# EAGLE board MystiqueJamma (EAGLE 9.1.3)
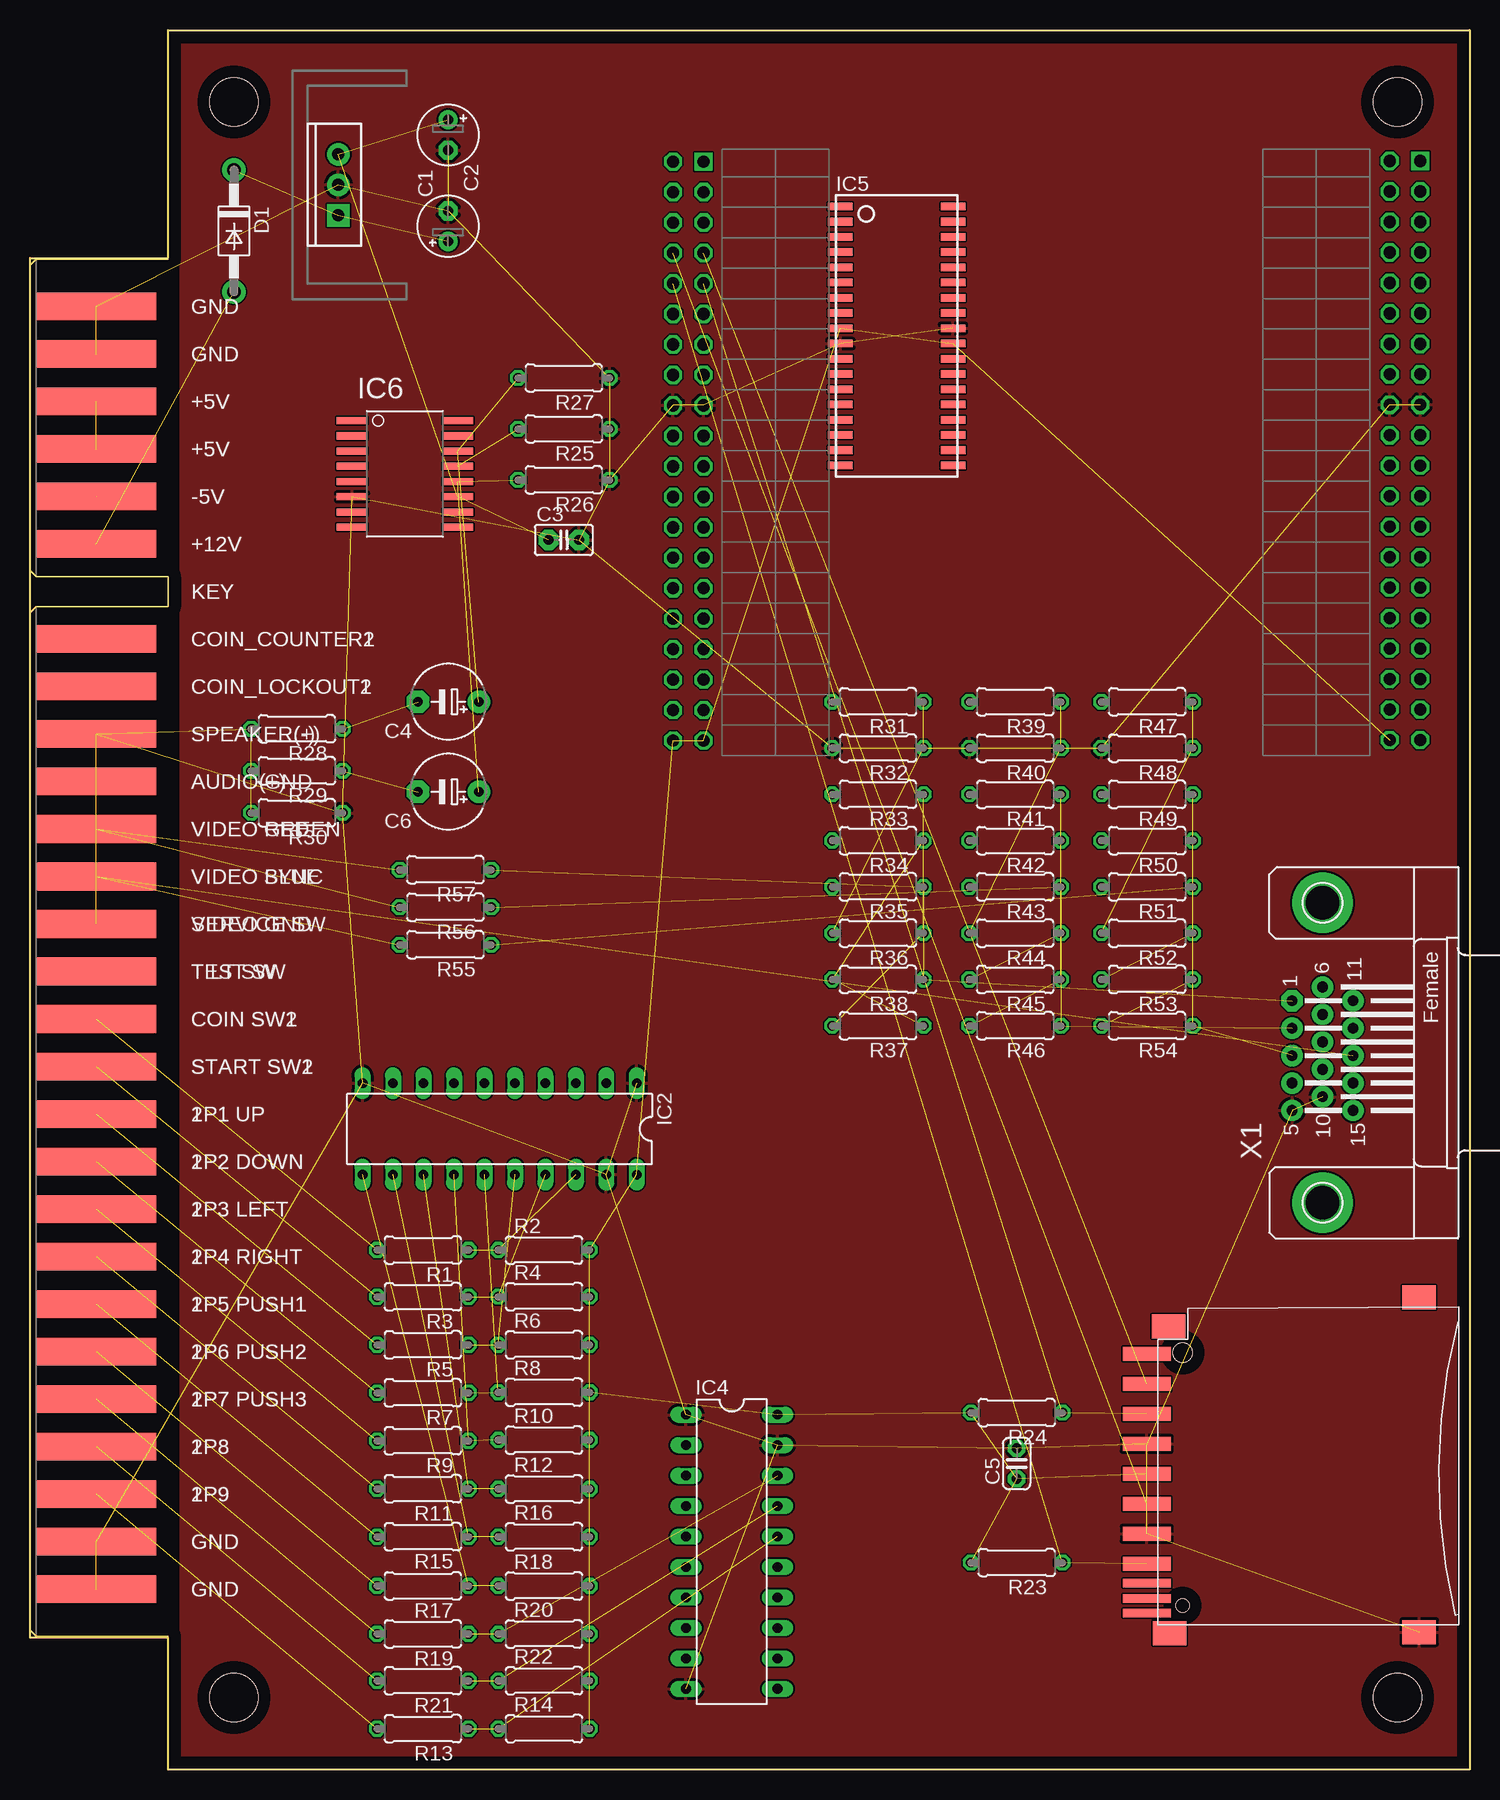
[diagram p0: board, top side]
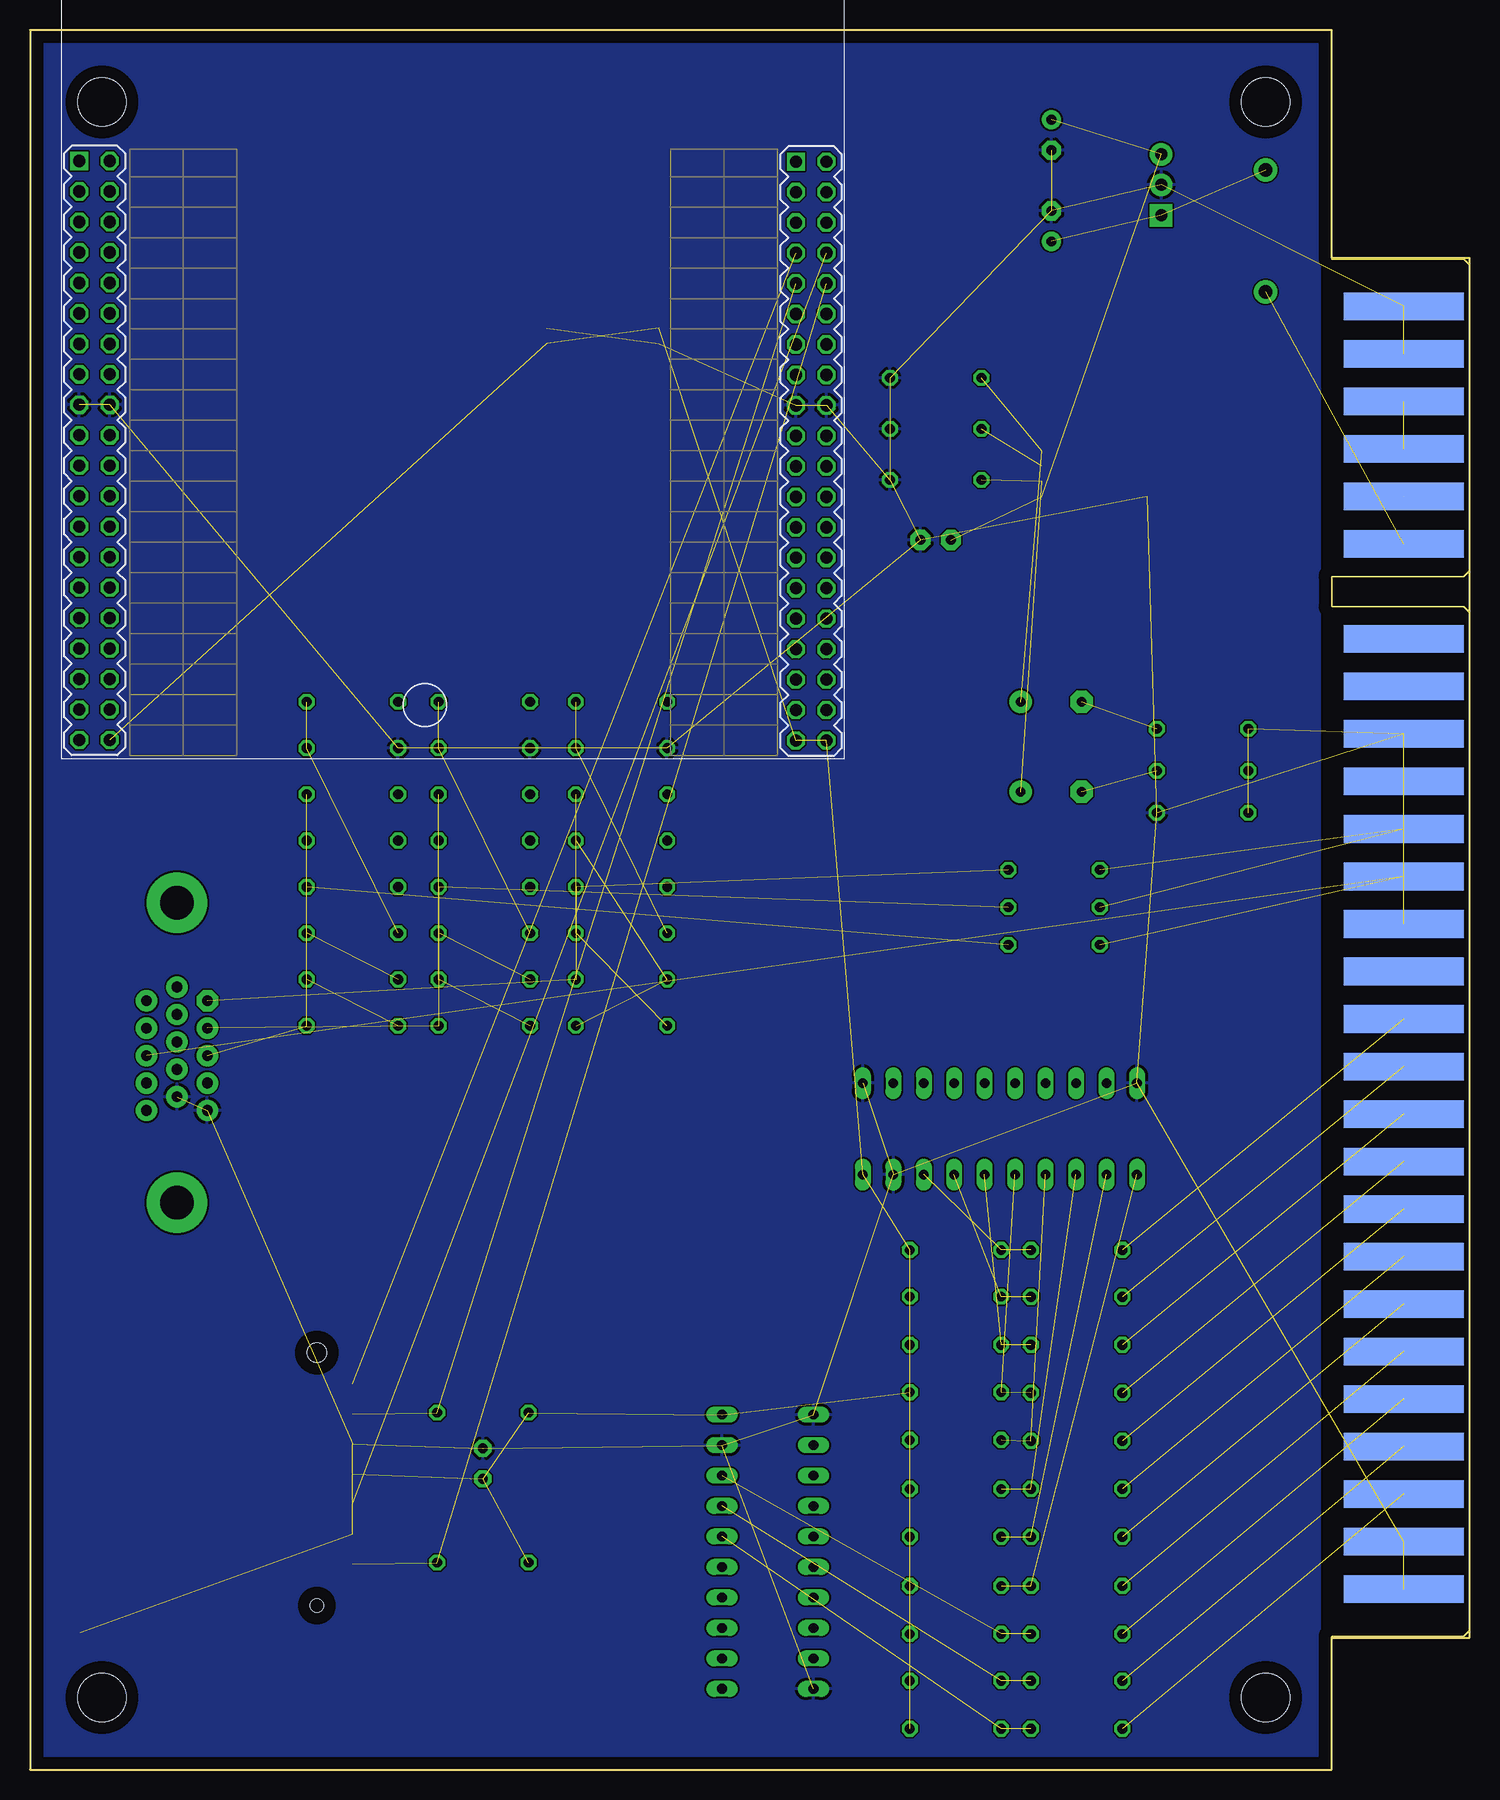
[diagram p1: board, bottom side, seen from below]

Size 120 x 145 mm. Coordinates in mm from the lower left corner, seen from the top.
Outline: 0,11 0,126 11.5,126 11.5,145 120,145 120,0 11.5,0 11.5,11 0,11
Copper layers (1*16): Top 0.035mm / dielectric 1.5mm / Bottom 0.035mm
Design rules "default": minimum track width 6mil, minimum drill 0.35mm, track to track 6mil, track to pad 6mil, pad to pad 6mil, via to via 6mil, smd to smd 6mil, copper to edge 40mil, drill to drill 6mil, minimum pad ring 10mil, minimum via ring 8mil, stop-mask expansion 4mil, vias tented up to drill 0mil, thermal gap 10mil
Holes 4 mm at 17,6 114,6 114,139 17,139

## Footprints (pad centres in the part's own frame; a part is rotated, then mirrored left to right if it is on the bottom)
E6V33 = drill 1.016 octagon: GND1 46.99,-31.14; GND2 46.99,-28.6; GND3 47.041,28.6; GND4 47.041,31.14; I0_1 31.801,31.14; I0_2 31.801,28.6; I0_3 29.261,31.14; I0_7 29.261,28.6; I0_10 26.721,31.14; I0_30 26.67,-28.6; I0_31 29.21,-31.14; I0_32 29.21,-28.6; I0_33 31.75,-31.14; I0_34 31.75,-28.6; I0_38 34.29,-31.14; I0_39 34.29,-28.6; I0_42 36.83,-31.14; I0_43 36.83,-28.6; I0_44 39.37,-31.14; I0_46 39.37,-28.6; I0_49 41.91,-31.14; I0_50 41.91,-28.6; I0_51 44.45,-31.14; I0_52 44.45,-28.6; I0_53 49.53,-31.14; I0_54 49.53,-28.6; I0_55 52.07,-31.14; I0_58 52.07,-28.6; I0_59 54.61,-31.14; I0_60 54.61,-28.6; I0_64 57.15,-31.14; I0_65 57.15,-28.6; I0_66 59.69,-31.14; I0_67 59.69,-28.6; I0_68 62.23,-31.14; I0_69 62.23,-28.6; I0_70 64.77,-31.14; I0_71 64.77,-28.6; I0_72 67.31,-31.14; I0_88 67.31,-28.6; I0_89 69.85,-31.14; I0_90 69.85,-28.6; I0_91 72.39,-31.14; I0_99 72.39,-28.6; I0_100 74.93,-31.14; I0_101 72.441,28.6; I0_103 72.441,31.14; I0_104 69.901,28.6; I0_105 69.901,31.14; I0_106 67.361,28.6; I0_110 67.361,31.14; I0_111 64.821,28.6; I0_112 64.821,31.14; I0_113 62.281,28.6; I0_114 62.281,31.14; I0_115 59.741,28.6; I0_119 59.741,31.14; I0_120 57.201,28.6; I0_121 57.201,31.14; I0_124 54.661,28.6; I0_125 54.661,31.14; I0_126 52.121,28.6; I0_127 52.121,31.14; I0_128 49.581,28.6; I0_129 49.581,31.14; I0_132 44.501,31.14; I0_133 44.501,28.6; I0_135 41.961,31.14; I0_136 41.961,28.6; I0_137 39.421,31.14; I0_138 39.421,28.6; I0_141 36.881,31.14; I0_142 36.881,28.6; I0_143 34.341,31.14; I0_144 34.341,28.6; VCC1 74.93,-28.6; VCC2 74.981,28.6; VCC3 74.981,31.14 | drill 1.016 square: I0_11 26.721,28.6; I0_28 26.67,-31.14
E2,5-5 = drill 0.813 pad 1.6: + -1.27,0 | drill 0.813 pad 1.6 octagon: - 1.27,0
C025-025X050 = drill 0.813 pad 1.676 octagon: 1 -1.27,0; 2 1.27,0
E5-6 = drill 0.813 pad 1.905: + -2.54,0 | drill 0.813 pad 1.905 octagon: - 2.54,0
C025-024X044 = drill 0.813 pad 1.422 octagon: 1 -1.27,0; 2 1.27,0
DO41-10 = drill 1.118 pad 1.93: A 5.08,0; C -5.08,0
TO220-IGO = drill 1 pad 1.88: GND 0,0; OUT 2.54,0 | drill 1 pad 1.88 square: IN -2.54,0
DIL20 = drill 0.813 long: 1 -11.43,-3.81; 2 -8.89,-3.81; 3 -6.35,-3.81; 4 -3.81,-3.81; 5 -1.27,-3.81; 6 1.27,-3.81; 7 3.81,-3.81; 8 6.35,-3.81; 9 8.89,-3.81; 10 11.43,-3.81; 11 11.43,3.81; 12 8.89,3.81; 13 6.35,3.81; 14 3.81,3.81; 15 1.27,3.81; 16 -1.27,3.81; 17 -3.81,3.81; 18 -6.35,3.81; 19 -8.89,3.81; 20 -11.43,3.81
SOJV36-400 = smd 0.635 x 2.032: 1 -10.795,-4.699; 2 -9.525,-4.699; 3 -8.255,-4.699; 4 -6.985,-4.699; 5 -5.715,-4.699; 6 -4.445,-4.699; 7 -3.175,-4.699; 8 -1.905,-4.699; 9 -0.635,-4.699; 10 0.635,-4.699; 11 1.905,-4.699; 12 3.175,-4.699; 13 4.445,-4.699; 14 5.715,-4.699; 15 6.985,-4.699; 16 8.255,-4.699; 17 9.525,-4.699; 18 10.795,-4.699; 19 10.795,4.699; 20 9.525,4.699; 21 8.255,4.699; 22 6.985,4.699; 23 5.715,4.699; 24 4.445,4.699; 25 3.175,4.699; 26 1.905,4.699; 27 0.635,4.699; 28 -0.635,4.699; 29 -1.905,4.699; 30 -3.175,4.699; 31 -4.445,4.699; 32 -5.715,4.699; 33 -6.985,4.699; 34 -8.255,4.699; 35 -9.525,4.699; 36 -10.795,4.699
SOIC-16NW = smd 0.6 x 2.54: 1 -4.445,-4.415; 2 -3.175,-4.415; 3 -1.905,-4.415; 4 -0.635,-4.415; 5 0.635,-4.415; 6 1.905,-4.415; 7 3.175,-4.415; 8 4.445,-4.415; 9 4.445,4.415; 10 3.175,4.415; 11 1.905,4.415; 12 0.635,4.415; 13 -0.635,4.415; 14 -1.905,4.415; 15 -3.175,4.415; 16 -4.445,4.415
JAMMA_TOP = smd 2.3 x 10: 1 -53.46,0; 2 -49.5,0; 3 -45.54,0; 4 -41.58,0; 5 -37.62,0; 6 -33.66,0; 8 -25.74,0; 9 -21.78,0; 10 -17.82,0; 11 -13.86,0; 12 -9.9,0; 13 -5.94,0; 14 -1.98,0; 15 1.98,0; 16 5.94,0; 17 9.9,0; 18 13.86,0; 19 17.82,0; 20 21.78,0; 21 25.74,0; 22 29.7,0; 23 33.66,0; 24 37.62,0; 25 41.58,0; 26 45.54,0; 27 49.5,0; 28 53.46,0
JAMMA_BOTTOM = smd 2.3 x 10 bottom: _A 33.66,0; _B 37.62,0; _C 41.58,0; _D 45.54,0; _E 49.5,0; _F 53.46,0; A -53.46,0; B -49.5,0; C -45.54,0; D -41.58,0; E -37.62,0; F -33.66,0; J -25.74,0; K -21.78,0; L -17.82,0; M -13.86,0; N -9.9,0; P -5.94,0; R -1.98,0; S 1.98,0; T 5.94,0; U 9.9,0; V 13.86,0; W 17.82,0; X 21.78,0; Y 25.74,0; Z 29.7,0
0207/7 = drill 0.813 octagon: 1 -3.81,0; 2 3.81,0
06132 = smd 1.2 x 4: 1 6.9,0.9; 2 4.4,0.9; 3 1.9,0.9; 4 -0.6,0.9; 5 -3.1,0.9; 6 -5.6,0.9; 7 -8.1,0.9; 9 9.4,0.9 | smd 0.7 x 4: 8 -9.7,0.9; CD -11,0.9; WP -12.2,0.9 | smd 2 x 2.8: GP -13.8,-21.8; GP2 14.1,-21.8; GP3 11.7,-0.9; GP4 -13.9,-1 | hole 1.1: -11.6,-2.1 | hole 1.6: 9.5,-2.1
HDF15H = drill 0.9 pad 1.778 octagon: 1 4.329,2.54 | drill 0.9 pad 1.778: 2 2.043,2.54; 3 -0.243,2.54; 4 -2.529,2.54; 5 -4.815,2.54; 6 5.472,0; 7 3.186,0; 8 0.9,0; 9 -1.386,0; 10 -3.672,0; 11 4.329,-2.54; 12 2.043,-2.54; 13 -0.243,-2.54; 14 -2.529,-2.54; 15 -4.815,-2.54 | drill 2.8 pad 5.08: P$1 -12.5,0; P$2 12.5,0

## Placement (x,y rotation side)
B1  [E6V33]  84.75,160.75 270 bottom
C1  10uF  [E2,5-5]  34.85,128.65 90 top
C2  10uF  [E2,5-5]  34.85,136.25 270 top
C3  100nF  [C025-025X050]  44.5,102.5 0 top
C4  4.7uF  [E5-6]  34.88,89 180 top
C5  100nF  [C025-024X044]  82.25,25.5 90 top
C6  4.7uF  [E5-6]  34.88,81.5 180 top
D1  1N4004  [DO41-10]  17,128.25 270 top
IC1  7805  [TO220-IGO]  25.7,132.1 90 top
IC2  74LS245N  [DIL20]  39.15,53.4 180 top
IC4  74LS245N  [DIL20]  58.5,18.15 270 top
IC5  CY7C1049CV33  [SOJV36-400]  72.25,119.5 270 top
IC6  TDA1543T  [SOIC-16NW]  31.25,108 270 top
JAMMA1  JAMMA_TOP  [JAMMA_TOP]  5.5,68.5 270 top
JAMMA2  JAMMA_BOTTOM  [JAMMA_BOTTOM]  5.5,68.5 270 top
R1  330  [0207/7]  32.75,43.3 180 top
R2  10k  [0207/7]  42.85,43.3 0 top
R3  330  [0207/7]  32.75,39.4 180 top
R4  10k  [0207/7]  42.85,39.42 0 top
R5  330  [0207/7]  32.75,35.4 180 top
R6  10k  [0207/7]  42.85,35.4 0 top
R7  330  [0207/7]  32.75,31.4 180 top
R8  10k  [0207/7]  42.85,31.45 0 top
R9  330  [0207/7]  32.75,27.4 180 top
R10  10k  [0207/7]  42.85,27.47 0 top
R11  330  [0207/7]  32.75,23.4 180 top
R12  10k  [0207/7]  42.85,23.38 0 top
R13  330  [0207/7]  32.75,3.4 180 top
R14  10k  [0207/7]  42.85,3.4 0 top
R15  330  [0207/7]  32.75,19.4 180 top
R16  10k  [0207/7]  42.85,19.4 0 top
R17  330  [0207/7]  32.75,15.3 180 top
R18  10k  [0207/7]  42.85,15.3 0 top
R19  330  [0207/7]  32.75,11.3 180 top
R20  10k  [0207/7]  42.85,11.3 0 top
R21  330  [0207/7]  32.75,7.4 180 top
R22  10k  [0207/7]  42.85,7.4 0 top
R23  10k  [0207/7]  82.25,17.25 180 top
R24  10k  [0207/7]  82.25,29.75 180 top
R25  1k  [0207/7]  44.5,111.75 180 top
R26  2k  [0207/7]  44.5,107.5 180 top
R27  2k  [0207/7]  44.5,116 180 top
R28  470  [0207/7]  22.25,86.75 180 top
R29  470  [0207/7]  22.25,83.25 180 top
R30  20k  [0207/7]  22.25,79.75 180 top
R31  2k  [0207/7]  70.69,89 180 top
R32  2k  [0207/7]  70.69,85.14 180 top
R33  2k  [0207/7]  70.69,81.29 180 top
R34  2k  [0207/7]  70.69,77.43 180 top
R35  2k  [0207/7]  70.69,73.57 180 top
R36  1k  [0207/7]  70.69,69.71 180 top
R37  1k  [0207/7]  70.69,62 180 top
R38  1k  [0207/7]  70.69,65.86 180 top
R39  2k  [0207/7]  82.12,89 180 top
R40  2k  [0207/7]  82.12,85.14 180 top
R41  2k  [0207/7]  82.12,81.29 180 top
R42  2k  [0207/7]  82.12,77.43 180 top
R43  2k  [0207/7]  82.12,73.57 180 top
R44  1k  [0207/7]  82.12,69.71 180 top
R45  1k  [0207/7]  82.12,65.86 180 top
R46  1k  [0207/7]  82.12,62 180 top
R47  2k  [0207/7]  93.12,89 180 top
R48  2k  [0207/7]  93.12,85.14 180 top
R49  2k  [0207/7]  93.12,81.29 180 top
R50  2k  [0207/7]  93.12,77.43 180 top
R51  2k  [0207/7]  93.12,73.57 180 top
R52  1k  [0207/7]  93.12,69.71 180 top
R53  1k  [0207/7]  93.12,65.86 180 top
R54  1k  [0207/7]  93.12,62 180 top
R55  220  [0207/7]  34.62,68.75 180 top
R56  220  [0207/7]  34.62,71.88 180 top
R57  220  [0207/7]  34.62,75 180 top
U$2  SDMMC06132  [06132]  94,25.25 90 top
X1  [HDF15H]  107.75,59.75 90 top

## Library data of the parts
B1 = FPGA-BOARD
C1 C2 = rcl-2
C3-C6 D1 R1-R57 U$2 X1 = adafruit
IC1 = SparkFun
IC2 IC4 = 74xx-us
IC5 = memory-sram
IC6 = TDA1543
JAMMA1 JAMMA2 = JAMMA

## Nets
12+: JAMMA2.F
+3V3: B1.VCC1 B1.VCC2 B1.VCC3 C5.1 IC2.20 IC4.20 IC5.9 IC5.27 R2.2 R4.2 R6.2 R8.2 R10.2 R12.2 R14.2 R16.2 R18.2 R20.2 R22.2 R23.2 R24.2 U$2.4
+5REG: C2.+ C3.1 IC1.OUT IC6.11
+5V: JAMMA1.3 JAMMA1.4 JAMMA2.C JAMMA2.D
+12: D1.A JAMMA1.6
-5V: JAMMA1.5 JAMMA2.E
COINSW1: JAMMA1.16 R1.2
CS1_: IC2.18 R1.1 R2.1
CS1_3V: IC2.2
DAC_DATA: IC6.5
DAC_FSYNC: IC6.4
DAC_SCK: IC6.3
DAC_VREF: IC6.13 R25.2
GND: B1.GND1 B1.GND2 B1.GND3 B1.GND4 C1.- C2.- C3.2 C5.2 IC1.GND IC2.1 IC2.10 IC2.19 IC4.1 IC4.10 IC4.19 IC5.10 IC5.28 IC6.6 JAMMA1.1 JAMMA1.2 JAMMA1.14 JAMMA1.27 JAMMA1.28 JAMMA2._E JAMMA2._F JAMMA2.A JAMMA2.B JAMMA2.L R25.1 R26.1 R27.1 R30.1 R32.2 R40.2 R48.2 U$2.3 U$2.6 U$2.GP X1.5 X1.10
JAMMA_SPK+: JAMMA1.10 R28.2 R29.2 R30.2
JVIDEO_BLUE: JAMMA1.13 R55.2
JVIDEO_GREEN: JAMMA2.N R56.2
JVIDEO_RED: JAMMA1.12 R57.2
L_A: C6.+ IC6.12 R26.2
L_AUDIO: C6.- R29.1
N$1: R31.1 R32.1 R36.2
N$2: C1.+ D1.C IC1.IN
N$3: R33.1 R36.1 R37.2
N$4: X1.8
N$5: X1.7
N$6: X1.6
N$7: R34.1 R37.1 R38.2
N$8: R39.1 R40.1 R44.2
N$9: R41.1 R44.1 R45.2
N$10: R42.1 R45.1 R46.2
N$11: R47.1 R48.1 R52.2
N$12: R49.1 R52.1 R53.2
N$13: R50.1 R53.1 R54.2
P1B1: JAMMA1.22 R15.2
P1B1_: IC2.12 R15.1 R16.1
P1B1_3V: IC2.8
P1B2: JAMMA1.23 R17.2
P1B2_: IC2.11 R17.1 R18.1
P1B2_3V: IC2.9
P1B3: JAMMA1.24 R19.2
P1B3_: IC4.18 R19.1 R20.1
P1B3_3V: IC4.2
P1B4: JAMMA1.25 R21.2
P1B4_: IC4.17 R21.1 R22.1
P1B4_3V: IC4.3
P1B5: JAMMA1.26 R13.2
P1B5_: IC4.16 R13.1 R14.1
P1B5_3V: IC4.4
P1D_: IC2.15 R7.1 R8.1
P1D_3V: IC2.5
P1DW: JAMMA1.19 R7.2
P1L_: IC2.14 R9.1 R10.1
P1L_3V: IC2.6
P1LH: JAMMA1.20 R9.2
P1R_: IC2.13 R11.1 R12.1
P1R_3V: IC2.7
P1RH: JAMMA1.21 R11.2
P1S_: IC2.17 R3.1 R4.1
P1S_3V: IC2.3
P1START: JAMMA1.17 R3.2
P1U_: IC2.16 R5.1 R6.1
P1U_3V: IC2.4
P1UP: JAMMA1.18 R5.2
R_A: C4.+ IC6.14 R27.2
R_AUDIO: C4.- R28.1
SD_CS_144: B1.I0_144 U$2.1
SD_DATAIN_142: B1.I0_142 R24.1 U$2.2
SD_DATAOUT_141: B1.I0_141 R23.1 U$2.7
SD_SCLK_143: B1.I0_143 U$2.5
SRAM_A0: IC5.1
SRAM_A1: IC5.2
SRAM_A2: IC5.3
SRAM_A3: IC5.4
SRAM_A4: IC5.5
SRAM_A5: IC5.14
SRAM_A6: IC5.15
SRAM_A7: IC5.16
SRAM_A8: IC5.17
SRAM_A9: IC5.18
SRAM_A10: IC5.20
SRAM_A11: IC5.21
SRAM_A12: IC5.22
SRAM_A13: IC5.23
SRAM_A14: IC5.24
SRAM_A15: IC5.32
SRAM_A16: IC5.33
SRAM_A17: IC5.34
SRAM_A18: IC5.35
SRAM_CE: IC5.6
SRAM_IO0: IC5.7
SRAM_IO1: IC5.8
SRAM_IO2: IC5.11
SRAM_IO3: IC5.12
SRAM_IO4: IC5.25
SRAM_IO5: IC5.26
SRAM_IO6: IC5.29
SRAM_IO7: IC5.30
SRAM_OE: IC5.31
SRAM_WE: IC5.13
VGA_B0: R47.2
VGA_B1: R49.2
VGA_B2: R50.2
VGA_B3: R51.2
VGA_BLUE: R51.1 R54.1 R55.1 X1.3
VGA_G0: R39.2
VGA_G1: R41.2
VGA_G2: R42.2
VGA_G3: R43.2
VGA_GREEN: R43.1 R46.1 R56.1 X1.2
VGA_HSYNC: JAMMA2.P X1.13
VGA_R0: R31.2
VGA_R1: R33.2
VGA_R2: R34.2
VGA_R3: R35.2
VGA_RED: R35.1 R38.1 R57.1 X1.1
VGA_VSYNC: X1.14

## Tracks (layer width: path | path; a pad name or v marks a point on that pad's centre or on a via)
+3V3  (21 unrouted)
+5REG  (3 unrouted)
+5V  (3 unrouted)
+12  (1 unrouted)
-5V  (1 unrouted)
COINSW1  (1 unrouted)
CS1_  (2 unrouted)
DAC_VREF  (1 unrouted)
GND  (39 unrouted)
  pour Top: 12.5,145 12.5,0 20.25,0 120,0 120,145 109.25,145
  pour Bottom: 12.5,145 12.5,0 14.25,0 120,0 120,2 120,145 114.75,145
JAMMA_SPK+  (3 unrouted)
JVIDEO_BLUE  (1 unrouted)
JVIDEO_GREEN  (1 unrouted)
JVIDEO_RED  (1 unrouted)
L_A  (2 unrouted)
L_AUDIO  (1 unrouted)
N$1  (2 unrouted)
N$2  (2 unrouted)
N$3  (2 unrouted)
N$7  (2 unrouted)
N$8  (2 unrouted)
N$9  (2 unrouted)
N$10  (2 unrouted)
N$11  (2 unrouted)
N$12  (2 unrouted)
N$13  (2 unrouted)
P1B1  (1 unrouted)
P1B1_  (2 unrouted)
P1B2  (1 unrouted)
P1B2_  (2 unrouted)
P1B3  (1 unrouted)
P1B3_  (2 unrouted)
P1B4  (1 unrouted)
P1B4_  (2 unrouted)
P1B5  (1 unrouted)
P1B5_  (2 unrouted)
P1D_  (2 unrouted)
P1DW  (1 unrouted)
P1L_  (2 unrouted)
P1LH  (1 unrouted)
P1R_  (2 unrouted)
P1RH  (1 unrouted)
P1S_  (2 unrouted)
P1START  (1 unrouted)
P1U_  (2 unrouted)
P1UP  (1 unrouted)
R_A  (2 unrouted)
R_AUDIO  (1 unrouted)
SD_CS_144  (1 unrouted)
SD_DATAIN_142  (2 unrouted)
SD_DATAOUT_141  (2 unrouted)
SD_SCLK_143  (1 unrouted)
VGA_BLUE  (3 unrouted)
VGA_GREEN  (3 unrouted)
VGA_HSYNC  (1 unrouted)
VGA_RED  (3 unrouted)

## Text on the board
tDocu: 40 (30) 39 (28) / 38 (32) 37 (31) / 36 (NC) 35 (33) / 34 (39) 33 (NC) / 32 (43) 31 (42) / 30 (46) 29 (44) / 28 (50) 27 (49) / 26 (52) 25 (51) / 24 (GND) 23 (GND) / 22 (54) 21 (53) / 20 (58) 19 (55) / 18 (60) 17 (59) / 16 (65) 15 (64) / 14 (67) 13 (66) / 12 (69) 11 (68) / 10 (71) 09 (NC) / 08 (88) 07 (72) / 06 (90) 05 (89) / 04 (99) 03 (91) / 02 (VCC) 01 (100) | 40 (10) 39 (11) / 38 (NC) 37 (7) / 36 (NC) 35 (NC) / 34 (143) 33 (144) / 32 (141) 31 (142) / 30 (137) 29 (NC) / 28 (135) 27 (136) / 26 (132) 25 (133) / 24 (GND) 23 (GND) / 22 (129) 21 (128) / 20 (127) 19 (126) / 18 (125) 17 (NC) / 16 (121) 15 (120) / 14 (119) 13 (115) / 12 (114) 11 (113) / 10 (112) 09 (111) / 08 (110) 07 (106) / 06 (105) 05 (104) / 04 (103) 03 (101) / 02 (I/0) 01 (Vcc)